# EAGLE board robot (EAGLE 9.6.2)
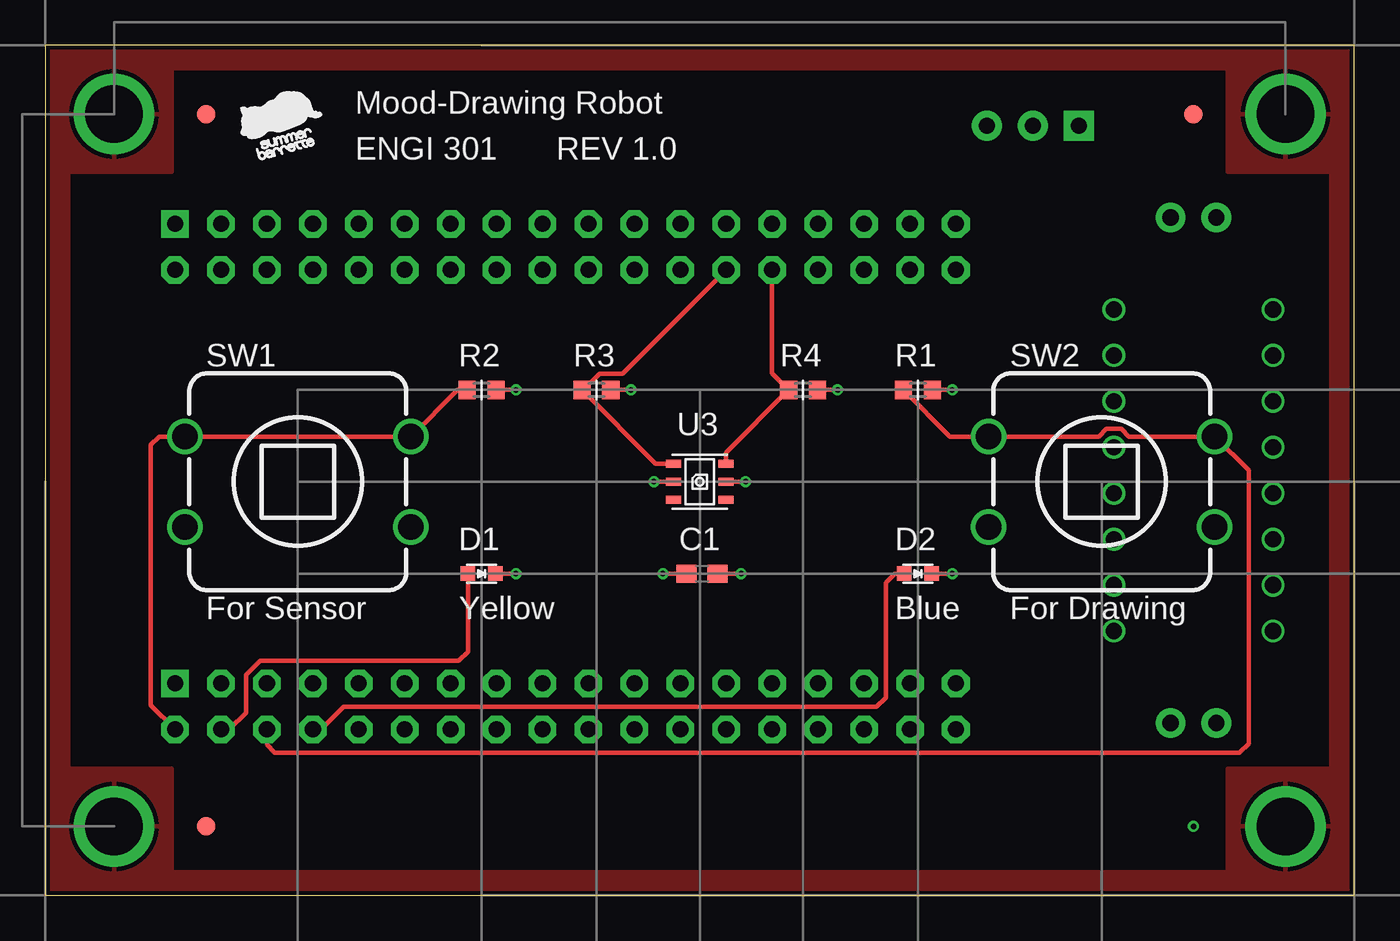
[diagram p0: board, top side]
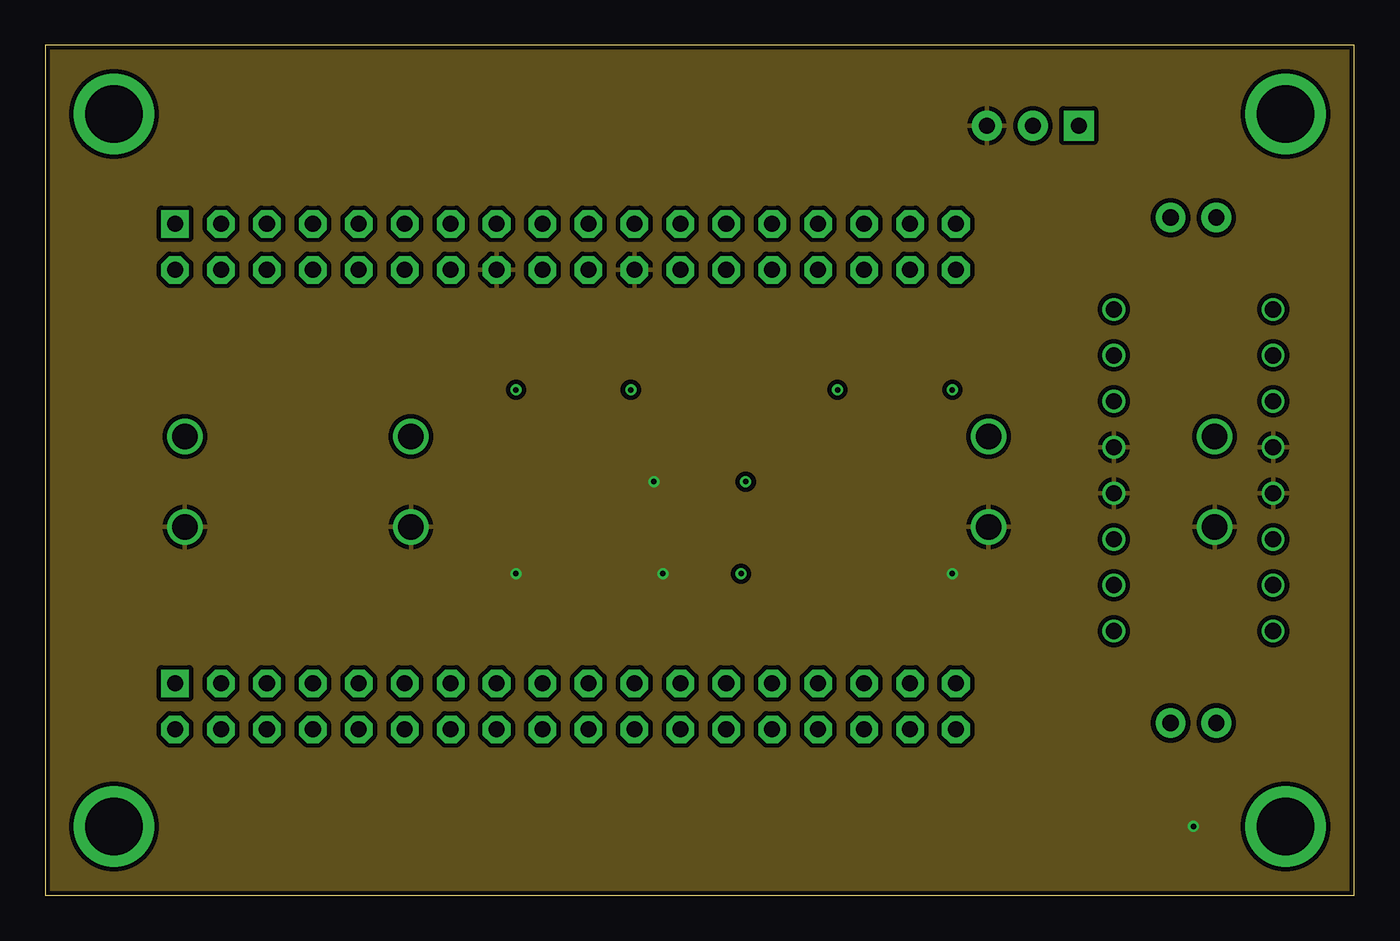
[diagram p1: board, inner layer Route2]
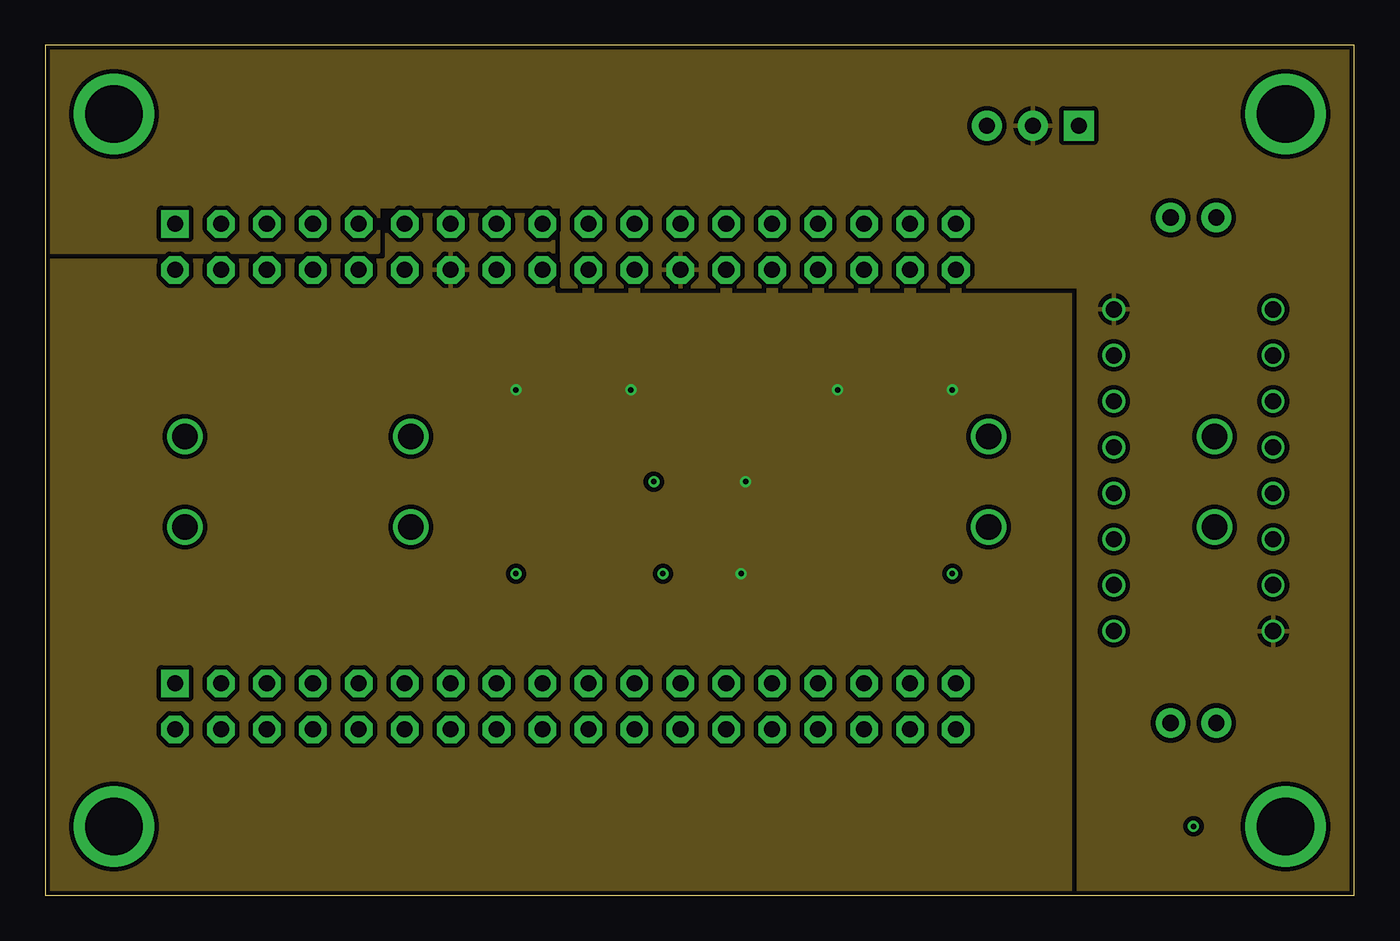
[diagram p2: board, inner layer Route15]
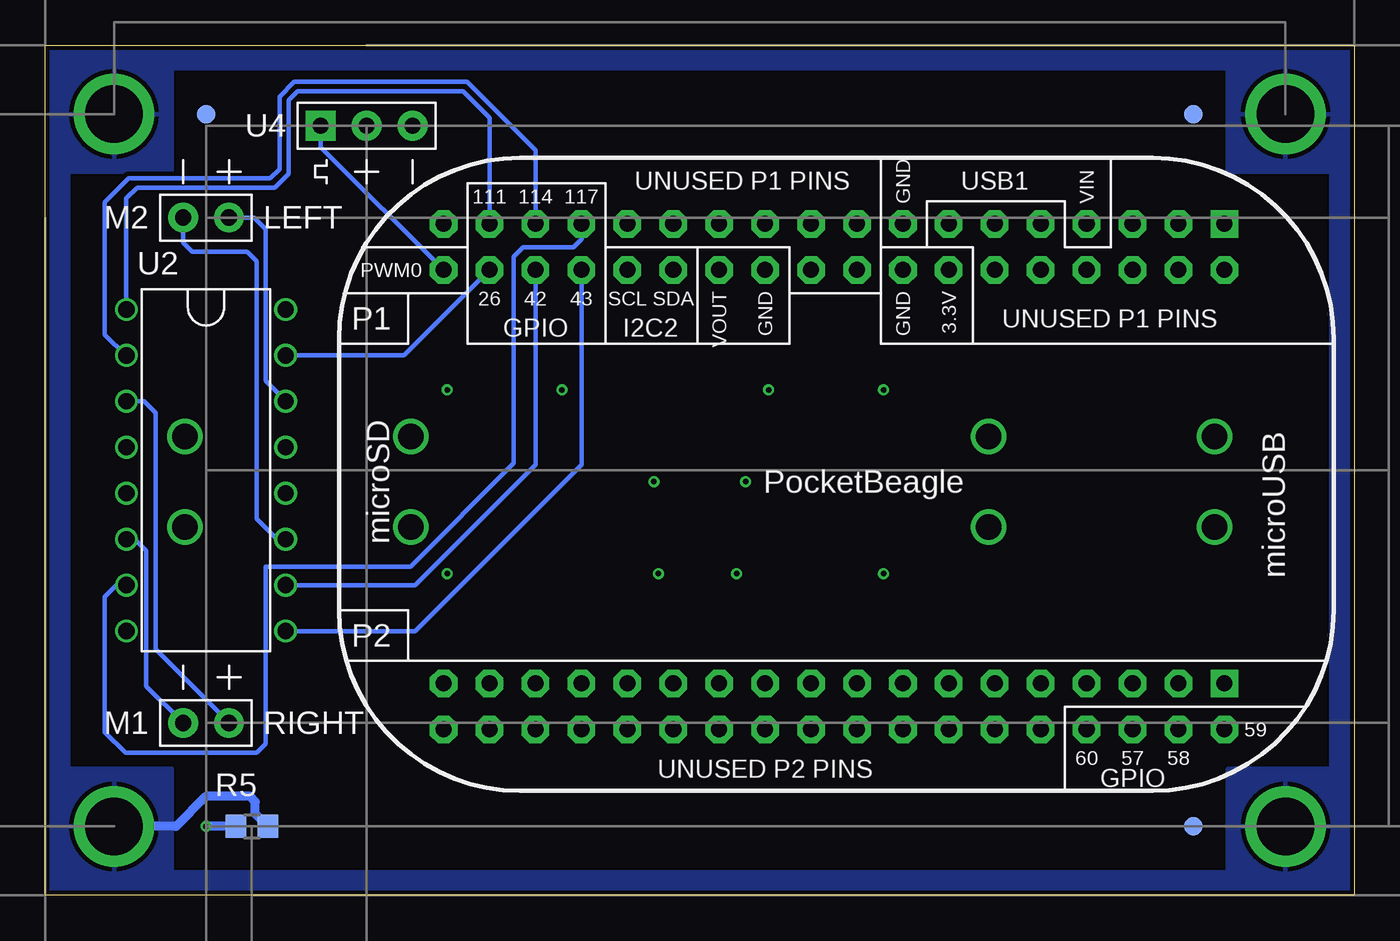
[diagram p3: board, bottom side, seen from below]

Size 72.39 x 46.99 mm. Coordinates in mm from the lower left corner, seen from the top.
Outline: 0,0 72.39,0 72.39,46.99 0,46.99 0,0
Copper layers (1*2*15*16): Top 0.035mm / dielectric 0.23mm / Route2 0.035mm / dielectric 0.93mm / Route15 0.035mm / dielectric 0.23mm / Bottom 0.035mm
Design rules "ENGI301_4lyr": minimum track width 10mil, minimum drill 12mil, track to track 10mil, track to pad 10mil, pad to pad 10mil, via to via 10mil, smd to smd 10mil, copper to edge 10mil, drill to drill 12mil, minimum pad ring 6mil, minimum via ring 6mil, stop-mask expansion 3mil, vias tented up to drill 25mil, thermal gap 10mil

## Footprints (pad centres in the part's own frame; a part is rotated, then mirrored left to right if it is on the bottom)
C0603 = smd 1.1 x 1: 1 -0.85,0; 2 0.85,0
LED_EIA_STD = smd 0.8 x 0.8: ANODE -0.75,0; CATHODE 0.75,0
FIDUCIAL_40MIL = smd 1.016 x 1.016: P$1 0,0
DC_MOTOR = drill 0.889 pad 1.651: 1 0,1.27; 2 0,-1.27
MOUNTING_HOLE = drill 3.175 pad 4.445: P$1 0,0
R0603 = smd 0.95 x 1.031: 1 -0.8,0; 2 0.8,0
R0805 = smd 1.143 x 1.27: 1 -0.889,0; 2 0.889,0
PUSH_BUTTON_12.5MM = drill 1.4: 1 -6.25,2.5; 2 -6.25,-2.5; 3 6.25,2.5; 4 6.25,-2.5
POCKETBEAGLE = drill 0.889 pad 1.524 square: P1_01 5.91,3.53; P2_01 5.91,28.93 | drill 0.889 pad 1.524 octagon: P1_02 5.91,6.07; P1_03 8.45,3.53; P1_04 8.45,6.07; P1_05 10.99,3.53; P1_06 10.99,6.07; P1_07 13.53,3.53; P1_08 13.53,6.07; P1_09 16.07,3.53; P1_10 16.07,6.07; P1_11 18.61,3.53; P1_12 18.61,6.07; P1_13 21.15,3.53; P1_14 21.15,6.07; P1_15 23.69,3.53; P1_16 23.69,6.07; P1_17 26.23,3.53; P1_18 26.23,6.07; P1_19 28.77,3.53; P1_20 28.77,6.07; P1_21 31.31,3.53; P1_22 31.31,6.07; P1_23 33.85,3.53; P1_24 33.85,6.07; P1_25 36.39,3.53; P1_26 36.39,6.07; P1_27 38.93,3.53; P1_28 38.93,6.07; P1_29 41.47,3.53; P1_30 41.47,6.07; P1_31 44.01,3.53; P1_32 44.01,6.07; P1_33 46.55,3.53; P1_34 46.55,6.07; P1_35 49.09,3.53; P1_36 49.09,6.07; P2_02 5.91,31.47; P2_03 8.45,28.93; P2_04 8.45,31.47; P2_05 10.99,28.93; P2_06 10.99,31.47; P2_07 13.53,28.93; P2_08 13.53,31.47; P2_09 16.07,28.93; P2_10 16.07,31.47; P2_11 18.61,28.93; P2_12 18.61,31.47; P2_13 21.15,28.93; P2_14 21.15,31.47; P2_15 23.69,28.93; P2_16 23.69,31.47; P2_17 26.23,28.93; P2_18 26.23,31.47; P2_19 28.77,28.93; P2_20 28.77,31.47; P2_21 31.31,28.93; P2_22 31.31,31.47; P2_23 33.85,28.93; P2_24 33.85,31.47; P2_25 36.39,28.93; P2_26 36.39,31.47; P2_27 38.93,28.93; P2_28 38.93,31.47; P2_29 41.47,28.93; P2_30 41.47,31.47; P2_31 44.01,28.93; P2_32 44.01,31.47; P2_33 46.55,28.93; P2_34 46.55,31.47; P2_35 49.09,28.93; P2_36 49.09,31.47
MOTOR_DRIVER = drill 0.9 pad 1.25: 1 -4.4,8.89; 2 -4.4,6.35; 3 -4.4,3.81; 4 -4.4,1.27; 5 -4.4,-1.27; 6 -4.4,-3.81; 7 -4.4,-6.35; 8 -4.4,-8.89; 9 4.4,-8.89; 10 4.4,-6.35; 11 4.4,-3.81; 12 4.4,-1.27; 13 4.4,1.27; 14 4.4,3.81; 15 4.4,6.35; 16 4.4,8.89
TEMP_SENSOR = smd 0.85 x 0.45: 1 -1.45,1; 2 -1.45,0; 3 -1.45,-1; 4 1.45,1; 5 1.45,0; 6 1.45,-1
SERVO = drill 0.889 pad 1.651 square: 1 0,2.54 | drill 0.889 pad 1.651: 2 0,0; 3 0,-2.54

## Placement (x,y rotation side)
C1  0.1μ  [C0603]  36.32,17.78 0 top
D1  YELLOW_LED  [LED_EIA_STD]  24.13,17.78 0 top
D2  BLUE_LED  [LED_EIA_STD]  48.26,17.78 0 top
FUD1  FIDUCIAL  [FIDUCIAL_40MIL]  8.89,43.18 0 top
FUD2  FIDUCIAL  [FIDUCIAL_40MIL]  63.5,43.18 0 bottom
FUD3  FIDUCIAL  [FIDUCIAL_40MIL]  8.89,3.81 0 top
FUD4  FIDUCIAL  [FIDUCIAL_40MIL]  8.89,43.18 0 bottom
FUD5  FIDUCIAL  [FIDUCIAL_40MIL]  63.5,43.18 0 top
FUD6  FIDUCIAL  [FIDUCIAL_40MIL]  8.89,3.81 0 bottom
M1  RIGHT_MOTOR  [DC_MOTOR]  63.5,9.53 270 bottom
M2  LEFT_MOTOR  [DC_MOTOR]  63.5,37.47 270 bottom
MGT1  MOUNTING_HOLE  [MOUNTING_HOLE]  68.58,43.18 0 top
MGT2  MOUNTING_HOLE  [MOUNTING_HOLE]  3.81,43.18 0 top
MGT3  MOUNTING_HOLE  [MOUNTING_HOLE]  3.81,3.81 0 top
MGT4  MOUNTING_HOLE  [MOUNTING_HOLE]  68.58,3.81 0 top
R1  1K  [R0603]  48.26,27.94 0 top
R2  1K  [R0603]  24.13,27.94 0 top
R3  10K  [R0603]  30.48,27.94 0 top
R4  10K  [R0603]  41.91,27.94 0 top
R5  0.1  [R0805]  60.96,3.81 0 bottom
SW1  PUSH_BUTTON  [PUSH_BUTTON_12.5MM]  13.97,22.86 0 top
SW2  PUSH_BUTTON  [PUSH_BUTTON_12.5MM]  58.42,22.86 0 top
U1  POCKETBEAGLE  [POCKETBEAGLE]  1.27,40.64 180 bottom
U2  MOTOR_DRIVER_L293D  [MOTOR_DRIVER]  63.5,23.5 0 bottom
U3  TEMP_SENSOR_SI7021  [TEMP_SENSOR]  36.2,22.86 0 top
U4  SERVO_SG90  [SERVO]  54.61,42.55 90 bottom
U$1  [LOGO]  10.79,40.64 0 top

## Library data of the parts
C1 D1 D2 FUD1-FUD6 M1 M2 MGT1-MGT4 R1-R5 SW1 SW2 U1-U4 U$1 = robot

## Nets
BLUE_BUTTON: R1.1 SW2.1 SW2.3 U1.P2_06
BLUE_LED: D2.ANODE U1.P2_08
CGND: MGT1.P$1 MGT2.P$1 MGT3.P$1 MGT4.P$1 R5.2
DRIVER_1,2EN: U1.P1_33 U2.1
DRIVER_1A: U1.P1_31 U2.2
DRIVER_1Y: M1.1 U2.3
DRIVER_2A: U1.P1_29 U2.7
DRIVER_2Y: M1.2 U2.6
DRIVER_3,4EN: U1.P1_30 U2.9
DRIVER_3A: U1.P1_32 U2.10
DRIVER_3Y: M2.2 U2.11
DRIVER_4A: U1.P1_34 U2.15
DRIVER_4Y: M2.1 U2.14
GND: C1.1 D1.CATHODE D2.CATHODE R5.1 SW1.2 SW1.4 SW2.2 SW2.4 U1.P1_16 U1.P1_22 U2.4 U2.5 U2.12 U2.13 U3.2 U4.3
SERVO: U1.P1_36 U4.1
TEMP_SEN_SCL: R4.1 U1.P1_28 U3.4
TEMP_SEN_SDA: R3.1 U1.P1_26 U3.1
VDD_3P3V: C1.2 R1.2 R2.2 R3.2 R4.2 U1.P1_14 U3.5
VDD_5V: U1.P1_24 U2.8 U2.16 U4.2
VIN_USB1: U1.P1_07
YELLOW_BUTTON: R2.1 SW1.1 SW1.3 U1.P2_02
YELLOW_LED: D1.ANODE U1.P2_04

## Tracks (layer width: path | path; a pad name or v marks a point on that pad's centre or on a via)
BLUE_BUTTON
  Top 0.254: R1.1 50.04,25.36 SW2.1 58.27,25.36 58.68,25.78 59.52,25.78 59.94,25.36 SW2.3 66.55,23.48 66.55,8.38 66.04,7.87 12.7,7.87 12.26,8.31 U1.P2_06
BLUE_LED
  Top 0.254: U1.P2_08 15.27,9.17 16.51,10.41 45.97,10.41 46.48,10.92 46.48,17.27 46.99,17.78 D2.ANODE
CGND
  Bottom 0.508: R5.2 60.77,4.51 60.77,5.16 61.07,5.46 63.51,5.46 65.16,3.81 MGT4.P$1
  pour Top: -1.27,22.86 -1.27,48.26 73.66,48.26 73.66,22.86 71.12,22.86 71.12,40.01 65.41,40.01 65.41,45.72 6.99,45.72 6.99,40.01 1.27,40.01 1.27,22.86
  pour Top: -1.27,22.86 -1.27,-1.27 73.66,-1.27 73.66,22.86 71.12,22.86 71.12,6.99 65.41,6.99 65.41,1.27 6.99,1.27 6.99,6.99 1.27,6.99 1.27,22.86
  pour Bottom: -1.27,22.86 -1.27,48.26 73.66,48.26 73.66,22.86 71.12,22.86 71.12,40.01 65.41,40.01 65.41,45.72 6.99,45.72 6.99,40.01 1.27,40.01 1.27,22.86
  pour Bottom: -1.27,22.86 -1.27,-1.27 73.66,-1.27 73.66,22.86 71.12,22.86 71.12,6.99 65.41,6.99 65.41,1.27 6.99,1.27 6.99,6.99 1.27,6.99 1.27,22.86
DRIVER_1,2EN
  Bottom 0.254: U2.1 67.9,38.53 67.31,39.12 59.69,39.12 58.93,39.88 58.93,43.94 58.42,44.45 49.28,44.45 47.82,42.99 U1.P1_33
DRIVER_1A
  Bottom 0.254: U2.2 67.94,29.84 69.09,30.99 69.09,38.31 67.77,39.62 59.94,39.62 59.44,40.13 59.44,44.15 58.63,44.96 49.07,44.96 45.28,41.17 U1.P1_31
DRIVER_1Y
  Bottom 0.254: U2.3 66.93,27.3 66.29,26.67 66.29,13.59 M1.1
DRIVER_2A
  Bottom 0.254: U1.P1_29 42.74,36.25 43.18,35.81 45.97,35.81 46.48,35.31 46.48,23.88 52.2,18.16 60.2,18.16 60.2,8.38 60.71,7.87 67.94,7.87 69.09,9.02 69.09,16.51 68.45,17.14 U2.7
DRIVER_2Y
  Bottom 0.254: U2.6 67.44,19.68 66.8,19.05 66.8,11.56 M1.2
DRIVER_3,4EN
  Bottom 0.254: U1.P1_30 42.74,23.81 51.94,14.61 U2.9
DRIVER_3A
  Bottom 0.254: U1.P1_32 45.28,23.81 51.94,17.14 U2.10
DRIVER_3Y
  Bottom 0.254: U2.11 59.56,19.68 60.71,20.83 60.71,35.05 61.21,35.56 64.26,35.56 64.77,36.07 M2.2
DRIVER_4A
  Bottom 0.254: U1.P1_34 52.55,29.84 U2.15
DRIVER_4Y
  Bottom 0.254: U2.14 59.1,27.35 60.2,28.45 60.2,36.83 60.83,37.47 M2.1
GND  (via drill 0.3 pad 0.61)
  Top 0.254: D1.CATHODE v26.04,17.78 | C1.1 v34.16,17.78 | U3.2 v33.66,22.86 | D2.CATHODE v50.16,17.78
  Bottom 0.508: R5.1 v63.5,3.81
  pour Route2: -1.27,49.53 74.93,49.53 74.93,-2.54 -2.54,-2.54 -2.54,49.53
SERVO
  Bottom 0.254: U1.P1_36 57.15,41.36 U4.1
TEMP_SEN_SCL
  Top 0.254: U3.4 37.65,24.48 R4.1 40.2,28.85 U1.P1_28
TEMP_SEN_SDA
  Top 0.254: U3.1 33.76,23.86 R3.1 29.75,27.94 30.65,28.84 31.93,28.84 U1.P1_26
VDD_3P3V  (via drill 0.3 pad 0.61)
  Top 0.254: R2.2 v26.04,27.94 | C1.2 v38.48,17.78 | R4.2 v43.81,27.94 | R1.2 v50.16,27.94 | v32.38,27.94 R3.2 | U3.5 v38.73,22.86
  pour Route15 (rank 6): -3.81,52.07 77.47,52.07 77.47,-5.08 -5.08,-5.08 -5.08,52.07
VDD_5V
  pour Route15: 80.01,-7.62 80.01,54.61 -7.62,54.61 -7.62,35.56 18.41,35.56 18.41,38.1 28.57,38.1 28.57,33.66 57.15,33.66 57.15,-7.62
YELLOW_BUTTON
  Top 0.254: R2.1 22.8,27.94 SW1.3 SW1.1 6.31,25.36 5.84,24.89 5.84,10.51 U1.P2_02
YELLOW_LED
  Top 0.254: U1.P2_04 10.19,9.17 11.12,10.1 11.12,12.18 11.89,12.95 22.86,12.95 23.38,13.47 D1.ANODE

## Text on the board
tNames: Mood-Drawing Robot | ENGI 301 | REV 1.0 | U3 | For Sensor | Yellow | Blue | For Drawing
bNames: LEFT | U2 | RIGHT